# EAGLE board 8051 (EAGLE 6.1)
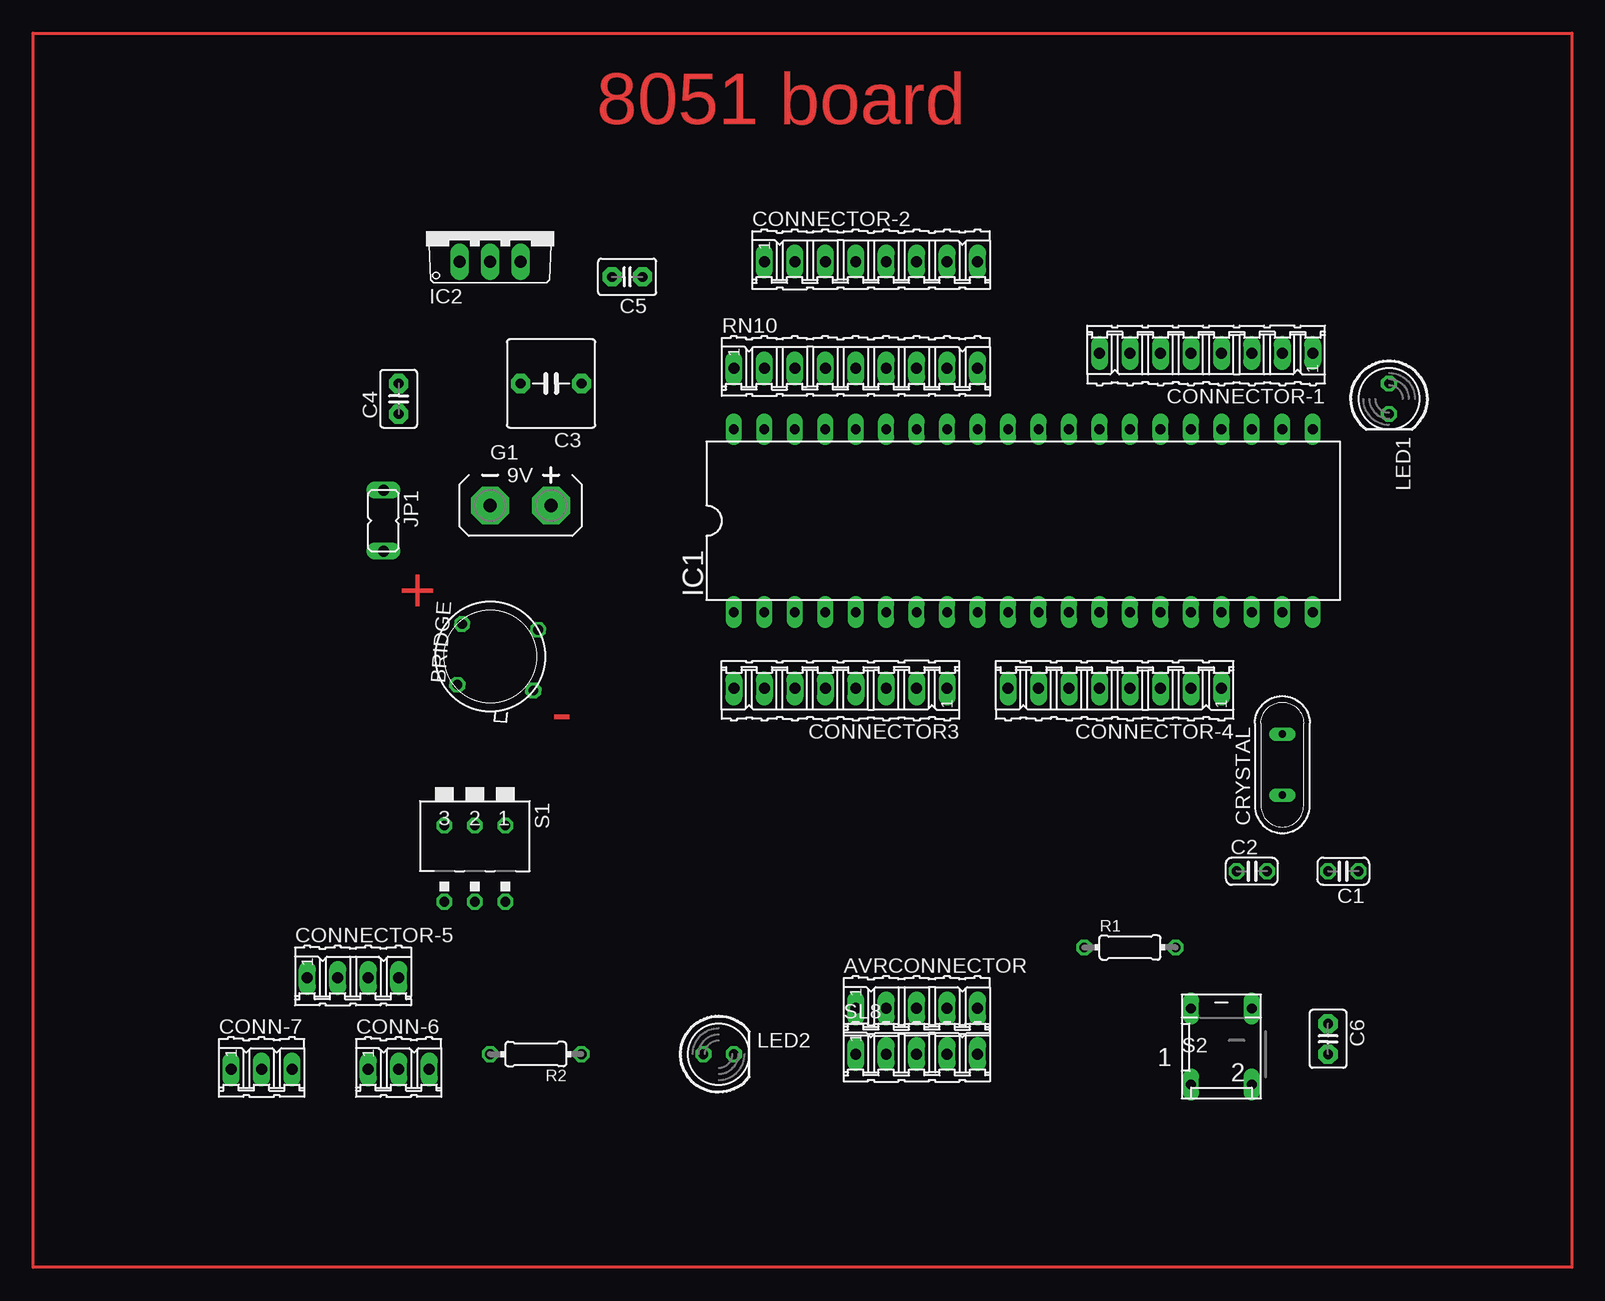
[diagram p0: board, top side]
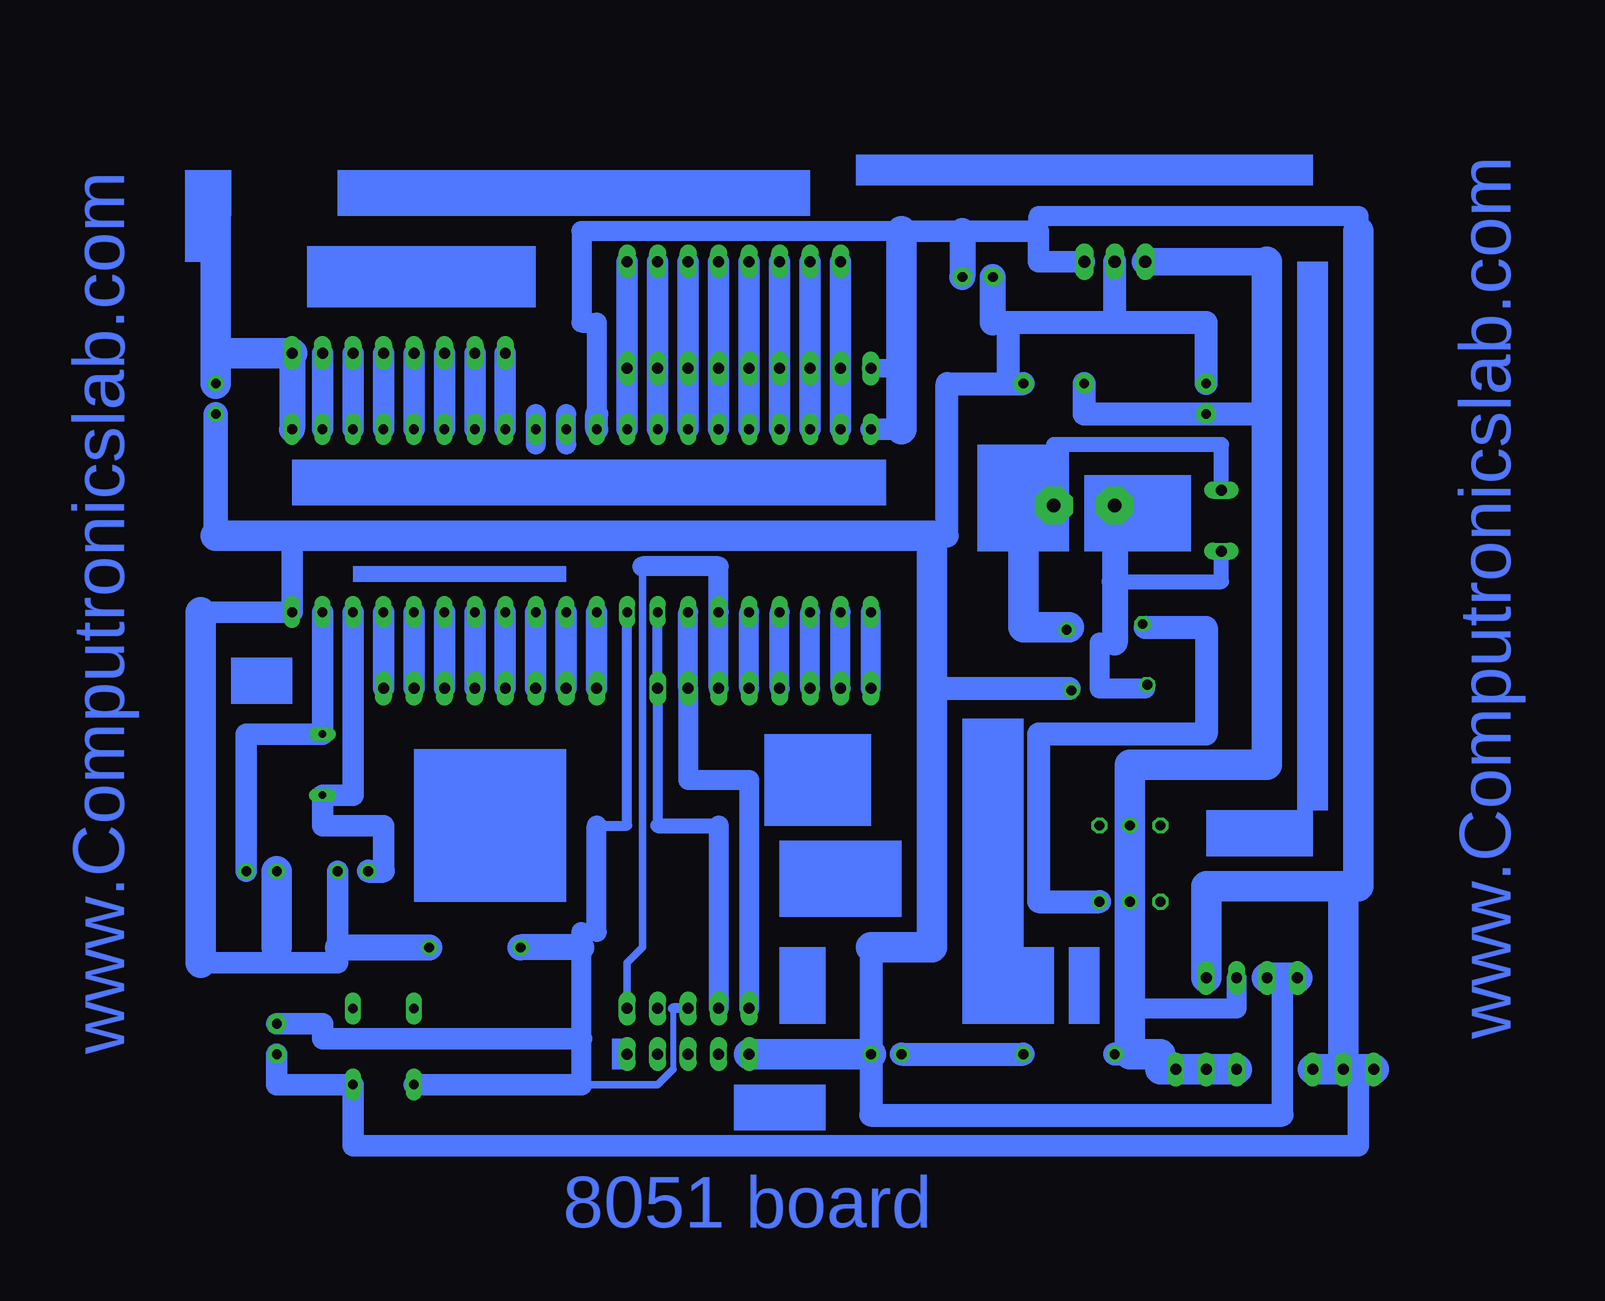
[diagram p1: board, bottom side, seen from below]

No outline drawn. Coordinates in mm, seen from the top.
Copper layers (1*16): Top 0.035mm / dielectric 1.5mm / Bottom 0.035mm
Design rules: minimum track width 10mil, minimum drill 24mil, track to track 8mil, track to pad 8mil, pad to pad 8mil, via to via 8mil, smd to smd 8mil, copper to edge 40mil, drill to drill 8mil, minimum pad ring 10mil, minimum via ring 8mil, stop-mask expansion 4mil, vias tented up to drill 0mil, thermal gap 10mil

## Footprints (pad centres in the part's own frame; a part is rotated, then mirrored left to right if it is on the bottom)
05P = drill 0.914 long: 1 -5.08,0; 2 -2.54,0; 3 0,0; 4 2.54,0; 5 5.08,0
TO39/4 = drill 0.813 octagon: 1 -2.54,-2.54; 2 2.54,-2.54; 3 2.54,3.81; 4 -2.54,3.81
C025-024X044 = drill 0.813 octagon: 1 -1.27,0; 2 1.27,0
C5B7.2 = drill 0.813 pad 1.6 octagon: 1 -2.54,0; 2 2.54,0
C2.5-3 = drill 0.813 pad 1.6 octagon: 1 -1.27,0; 2 1.27,0
03P = drill 0.914 long: 1 -2.54,0; 2 0,0; 3 2.54,0
08P = drill 0.914 long: 1 -8.89,0; 2 -6.35,0; 3 -3.81,0; 4 -1.27,0; 5 1.27,0; 6 3.81,0; 7 6.35,0; 8 8.89,0
04P = drill 0.914 long: 1 -3.81,0; 2 -1.27,0; 3 1.27,0; 4 3.81,0
QS = drill 0.61 long: 1 -2.54,0; 2 2.54,0
AB9V = drill 1.118 pad 3.15 octagon: + 0,2.54; - 0,-2.54
DIL40 = drill 0.813 long: 1 -24.13,-7.62; 2 -21.59,-7.62; 3 -19.05,-7.62; 4 -16.51,-7.62; 5 -13.97,-7.62; 6 -11.43,-7.62; 7 -8.89,-7.62; 8 -6.35,-7.62; 9 -3.81,-7.62; 10 -1.27,-7.62; 11 1.27,-7.62; 12 3.81,-7.62; 13 6.35,-7.62; 14 8.89,-7.62; 15 11.43,-7.62; 16 13.97,-7.62; 17 16.51,-7.62; 18 19.05,-7.62; 19 21.59,-7.62; 20 24.13,-7.62; 21 24.13,7.62; 22 21.59,7.62; 23 19.05,7.62; 24 16.51,7.62; 25 13.97,7.62; 26 11.43,7.62; 27 8.89,7.62; 28 6.35,7.62; 29 3.81,7.62; 30 1.27,7.62; 31 -1.27,7.62; 32 -3.81,7.62; 33 -6.35,7.62; 34 -8.89,7.62; 35 -11.43,7.62; 36 -13.97,7.62; 37 -16.51,7.62; 38 -19.05,7.62; 39 -21.59,7.62; 40 -24.13,7.62
TO220V = drill 1.016 long: 1 -2.54,-2.54; 2 0,-2.54; 3 2.54,-2.54
JP1 = drill 0.914 long: 1 0,-2.54; 2 0,2.54
LED5MM = drill 0.813 octagon: A -1.27,0; K 1.27,0
0204/7 = drill 0.813 octagon: 1 -3.81,0; 2 3.81,0
09P = drill 0.914 long: 1 -10.16,0; 2 -7.62,0; 3 -5.08,0; 4 -2.54,0; 5 0,0; 6 2.54,0; 7 5.08,0; 8 7.62,0; 9 10.16,0
DA-03 = drill 0.813 octagon: 1 -2.54,-5.08; 2 0,-5.08; 3 2.54,-5.08; 4 2.54,1.27; 5 0,1.27; 6 -2.54,1.27
DP-02 = drill 0.813 long: 1 -2.54,-2.54; 2 2.54,-2.54; 3 2.54,3.81; 4 -2.54,3.81

## Placement (x,y rotation side)
AVRCONNECTOR  [05P]  58.42,6.35 0 top
BRIDGE  [TO39/4]  24.13,35.56 85.6 top
C1  33pf  [C025-024X044]  93.98,17.78 180 top
C2  33pf  [C025-024X044]  86.36,17.78 0 top
C3  470uf  [C5B7.2]  27.94,58.42 180 top
C4  .01uf  [C2.5-3]  15.24,57.15 90 top
C5  4.7uf  [C2.5-3]  34.29,67.31 180 top
C6  0.1uf  [C2.5-3]  92.71,3.81 270 top
CONN-6  3 pin  [03P]  15.24,1.27 0 top
CONN-7  3 pin  [03P]  3.81,1.27 0 top
CONNECTOR3  8 pin  [08P]  52.07,33.02 180 top
CONNECTOR-1  8 pin  [08P]  82.55,60.96 180 top
CONNECTOR-2  8 pin  [08P]  54.61,68.58 0 top
CONNECTOR-4  8 pin  [08P]  74.93,33.02 180 top
CONNECTOR-5  4 pin  [04P]  11.43,8.89 0 top
CRYSTAL  11.0592 mhz  [QS]  88.9,26.67 90 top
G1  AB9V  [AB9V]  25.4,48.26 270 top
IC1  AT89S51  [DIL40]  67.31,46.99 0 top
IC2  7805TV  [TO220V]  22.86,71.12 0 top
JP1  TRANSFORMER  [JP1]  13.97,46.99 180 top
LED1  5mm  [LED5MM]  97.79,57.15 270 top
LED2  5mm  [LED5MM]  41.91,2.54 0 top
R1  10k  [0204/7]  76.2,11.43 0 top
R2  560E  [0204/7]  26.67,2.54 180 top
RN10  10 k  [09P]  53.34,59.69 0 top
S1  [DA-03]  21.59,16.51 180 top
S2  push switch  [DP-02]  83.82,2.54 0 top
SL8  [05P]  58.42,2.54 0 top

## Library data of the parts
AVRCONNECTOR CONN-6 CONN-7 CONNECTOR3 CONNECTOR-1 CONNECTOR-2 CONNECTOR-4 CONNECTOR-5 RN10 SL8 = con-amp-quick; OC_FARNELL: unknown; OC_NEWARK: unknown
BRIDGE IC2 = linear
C1 C2 = rcl
C3-C6 = capacitor-wima
CRYSTAL = special
G1 = battery
IC1 = atmel; OC_FARNELL: unknown; OC_NEWARK: unknown
JP1 = jumper
LED1 LED2 = led
R1 R2 = eagle-ltspice; SPICEMODEL: NONE; SPICEPREFIX: R
S1 = switch-dil; MPN: MCDA03; OC_FARNELL: 1521999; OC_NEWARK: 74M2972
S2 = switch-dil; MPN: MCDP02; OC_FARNELL: 1255233; OC_NEWARK: 26M1095

## Nets
N$1: C2.1 CRYSTAL.1 IC1.18
N$2: C1.1 CRYSTAL.2 IC1.19
N$4: C3.2 C4.1 CONN-6.1 CONN-6.2 CONN-6.3 CONNECTOR-5.3 IC2.1 R2.2 S1.5
N$5: BRIDGE.2 G1.+ JP1.1
N$6: CONNECTOR-4.8 IC1.10
N$7: CONNECTOR-4.7 IC1.11
N$8: CONNECTOR-4.6 IC1.12
N$9: CONNECTOR-4.5 IC1.13
N$10: CONNECTOR-4.4 IC1.14
N$11: CONNECTOR-4.3 IC1.15
N$12: CONNECTOR-4.2 IC1.16
N$13: CONNECTOR-4.1 IC1.17
N$14: AVRCONNECTOR.3 C6.1 IC1.9 R1.1 S2.1
N$15: AVRCONNECTOR.1 CONNECTOR3.2 IC1.7
N$16: BRIDGE.4 G1.- JP1.2
N$17: CONNECTOR3.4 IC1.5
N$18: CONNECTOR3.5 IC1.4
N$19: CONNECTOR3.6 IC1.3
N$20: CONNECTOR3.7 IC1.2
N$21: CONNECTOR3.8 IC1.1
N$22: CONNECTOR-2.1 IC1.39 RN10.2
N$23: CONNECTOR-2.2 IC1.38 RN10.3
N$24: CONNECTOR-2.3 IC1.37 RN10.4
N$25: CONNECTOR-2.4 IC1.36 RN10.5
N$26: CONNECTOR-2.5 IC1.35 RN10.6
N$27: CONNECTOR-2.6 IC1.34 RN10.7
N$28: CONNECTOR-2.7 IC1.33 RN10.8
N$29: CONNECTOR-2.8 IC1.32 RN10.9
N$30: CONNECTOR-1.1 IC1.21 LED1.A
N$31: CONNECTOR-1.2 IC1.22
N$32: CONNECTOR-1.3 IC1.23
N$33: CONNECTOR-1.4 IC1.24
N$34: CONNECTOR-1.5 IC1.25
N$35: CONNECTOR-1.6 IC1.26
N$36: CONNECTOR-1.7 IC1.27
N$37: CONNECTOR-1.8 IC1.28
N$39: C5.1 C6.2 CONN-7.1 CONN-7.2 CONN-7.3 CONNECTOR-5.4 IC1.31 IC1.40 IC2.3 RN10.1 S2.2
N$41: BRIDGE.1 C1.2 C2.2 C3.1 C4.2 C5.2 CONNECTOR-5.1 CONNECTOR-5.2 IC1.20 IC2.2 LED1.K LED2.K R1.2 SL8.1
N$42: AVRCONNECTOR.5 CONNECTOR3.3 IC1.6
N$43: LED2.A R2.1
N$45: AVRCONNECTOR.2 CONNECTOR3.1 IC1.8
N$47: BRIDGE.3 S1.6

## Tracks (layer width: path | path; a pad name or v marks a point on that pad's centre or on a via)
N$1
  Bottom 1.778: 83.82,17.78 83.82,21.59 88.9,21.59 CRYSTAL.1 86.36,24.13 IC1.18
  Bottom 1.93: C2.1 83.82,17.78
N$2
  Bottom 1.778: IC1.19 CRYSTAL.2 95.25,29.21 C1.1
N$3
  Top 0.254: -15.24,87.63 113.03,87.63 113.03,-15.24 -15.24,-15.24 -15.24,87.63
N$4
  Bottom 1.676: CONNECTOR-5.3 12.7,6.35 21.59,6.35
  Bottom 1.93: 21.59,2.54 R2.2 | 10.16,55.88 C4.1 25.4,55.88 C3.2
  Bottom 2.286: 10.16,68.58 IC2.1
  Bottom 2.54: 10.16,68.58 10.16,55.88 10.16,26.67 21.59,26.67 S1.5 21.59,6.35 21.59,2.54 19.05,2.54 19.05,1.27 CONN-6.3 CONN-6.2 CONN-6.1
N$5
  Bottom 0.254: G1.+ 26.67,48.26 | 26.67,38.1 BRIDGE.2
  Bottom 0.406: 27.94,53.34 G1.+
  Bottom 1.27: JP1.1 13.97,53.34 27.94,53.34
  Bottom 2.54: G1.+ 30.48,48.26 30.48,38.1 26.67,38.1
N$6
  Bottom 1.778: CONNECTOR-4.8 IC1.10
N$7
  Bottom 1.778: CONNECTOR-4.7 IC1.11
N$8
  Bottom 1.778: CONNECTOR-4.6 IC1.12
N$9
  Bottom 1.778: CONNECTOR-4.5 IC1.13
N$10
  Bottom 1.778: CONNECTOR-4.4 IC1.14
N$11
  Bottom 1.778: CONNECTOR-4.3 IC1.15
N$12
  Bottom 1.778: CONNECTOR-4.2 IC1.16
N$13
  Bottom 1.778: CONNECTOR-4.1 IC1.17
N$14
  Bottom 0.508: 59.69,6.35 59.69,1.27
  Bottom 0.61: 67.31,0 60.96,0 59.69,1.27
  Bottom 0.813: 67.31,12.7 66.04,12.7 | 66.04,21.59 63.5,21.59 IC1.9 | AVRCONNECTOR.3 59.69,6.35
  Bottom 1.676: 66.04,12.7 66.04,21.59 | 67.31,0 67.31,3.81 67.31,11.43 67.31,12.7
  Bottom 1.778: 67.31,0 S2.1 | C6.1 88.9,5.08 88.9,3.81 67.31,3.81
  Bottom 2.184: 67.31,11.43 R1.1
N$15
  Bottom 1.676: IC1.7 CONNECTOR3.2 58.42,25.4 53.34,25.4 AVRCONNECTOR.1
N$16
  Bottom 0.254: 20.32,33.02 BRIDGE.4 | 22.86,36.83 24.13,36.83
  Bottom 1.27: JP1.2 13.97,41.91 22.86,41.91
  Bottom 1.676: 24.13,36.83 24.13,33.02 20.32,33.02
  Bottom 2.184: G1.- 22.86,41.91 22.86,36.83
N$17
  Bottom 1.676: CONNECTOR3.4 IC1.5
N$18
  Bottom 1.676: CONNECTOR3.5 IC1.4
N$19
  Bottom 1.676: CONNECTOR3.6 IC1.3
N$20
  Bottom 1.676: CONNECTOR3.7 IC1.2
N$21
  Bottom 1.676: CONNECTOR3.8 IC1.1
N$22
  Bottom 1.778: IC1.39 RN10.2 CONNECTOR-2.1
N$23
  Bottom 1.778: IC1.38 RN10.3 CONNECTOR-2.2
N$24
  Bottom 1.778: IC1.37 RN10.4 CONNECTOR-2.3
N$25
  Bottom 1.778: IC1.36 RN10.5 CONNECTOR-2.4
N$26
  Bottom 1.778: IC1.35 RN10.6 CONNECTOR-2.5
N$27
  Bottom 1.778: IC1.34 RN10.7 CONNECTOR-2.6
N$28
  Bottom 1.778: IC1.33 RN10.8 CONNECTOR-2.7
N$29
  Bottom 1.778: IC1.32 RN10.9 CONNECTOR-2.8
N$30
  Bottom 2.184: CONNECTOR-1.1 IC1.21
  Bottom 2.54: 97.79,72.39 97.79,60.96 | 97.79,60.96 LED1.A | 97.79,60.96 CONNECTOR-1.1
N$31
  Bottom 1.778: CONNECTOR-1.2 IC1.22
N$32
  Bottom 1.778: CONNECTOR-1.3 IC1.23
N$33
  Bottom 1.778: CONNECTOR-1.4 IC1.24
N$34
  Bottom 1.778: CONNECTOR-1.5 IC1.25
N$35
  Bottom 1.778: CONNECTOR-1.6 IC1.26
N$36
  Bottom 1.778: CONNECTOR-1.7 IC1.27
N$37
  Bottom 1.778: CONNECTOR-1.8 IC1.28
N$39
  Bottom 1.524: 40.64,59.69 RN10.1
  Bottom 1.676: 66.04,55.88 66.04,63.5 67.31,63.5 67.31,71.12 40.64,71.12 | 29.21,71.12 29.21,72.39 2.54,72.39 2.54,71.12
  Bottom 1.778: 40.64,71.12 35.56,71.12 29.21,71.12 29.21,68.58 IC2.3 | 40.64,54.61 IC1.40 | 2.54,1.27 2.54,-5.08 86.36,-5.08 S2.2 92.71,0 C6.2
  Bottom 1.93: IC1.31 66.04,55.88
  Bottom 2.184: 35.56,71.12 C5.1
  Bottom 2.54: 40.64,71.12 40.64,59.69 40.64,54.61 | 3.81,16.51 2.54,16.51 2.54,71.12 | 3.81,16.51 15.24,16.51 CONNECTOR-5.4 | CONN-7.2 2.54,1.27 CONN-7.1 | CONN-7.2 CONN-7.3 | 3.81,16.51 CONN-7.2
N$40
  Bottom 1.676: 68.58,53.34 68.58,55.88
N$41
  Bottom 0.254: C1.2 92.71,10.16 | 31.75,58.42 C3.1 | 26.67,33.02 BRIDGE.1 | 43.18,45.72 36.83,45.72 | 31.75,63.5 33.02,63.5 | 87.63,15.24 87.63,11.43
  Bottom 1.778: C2.2 87.63,15.24 87.63,10.16 92.71,10.16 99.06,10.16 | 91.44,45.72 IC1.20 99.06,39.37 | 8.89,-2.54 8.89,8.89
  Bottom 1.93: 43.18,11.43 LED2.K 43.18,-2.54 8.89,-2.54 | 22.86,63.5 IC2.2 | C4.2 15.24,63.5 22.86,63.5 | 22.86,63.5 31.75,63.5 31.75,58.42 | 38.1,33.02 26.67,33.02 | 8.89,8.89 CONNECTOR-5.2 | 36.83,45.72 36.83,58.42 C3.1
  Bottom 2.032: LED1.K 97.79,45.72
  Bottom 2.184: 33.02,63.5 C5.2 | 87.63,11.43 R1.2
  Bottom 2.54: CONNECTOR-5.2 CONNECTOR-5.1 | 97.79,45.72 91.44,45.72 43.18,45.72 38.1,45.72 38.1,33.02 38.1,11.43 43.18,11.43 | 92.71,11.43 C1.2 | 99.06,39.37 99.06,10.16 | SL8.1 LED2.K
N$42
  Bottom 0.61: AVRCONNECTOR.5 63.5,10.16 62.23,11.43 62.23,43.18
  Bottom 1.676: CONNECTOR3.3 IC1.6 55.88,43.18 62.23,43.18
N$43
  Bottom 1.93: LED2.A R2.1
N$44
  Bottom 1.676: 71.12,55.88 71.12,53.34
N$45
  Bottom 0.813: IC1.8 CONNECTOR3.1 60.96,21.59
  Bottom 1.27: 60.96,21.59 55.88,21.59
  Bottom 1.676: 55.88,21.59 AVRCONNECTOR.2
N$47
  Bottom 0.254: 20.32,38.1 BRIDGE.3
  Bottom 1.93: S1.6 29.21,15.24 29.21,29.21 15.24,29.21 15.24,38.1 20.32,38.1
(copper drawn outside any net)
  shapes: Bottom area x23

## Text on the board
Top: 8051 board | + | -
Bottom: www.Computronicslab.com | www.Computronicslab.com | 8051 board